# Altium PCB PS Digital Test v1.0.PcbDoc (part 3 of 3)
Units mil, origin at the board's own origin, x right, y up, seen from the top; angles counter-clockwise.
Board outline 3937.01 x 3937.01 mil, 4 copper layers (Top Layer, Signal Layer 1, Signal Layer 2, Bottom Layer), stack 55.634 mil thick; 120 components, 122 nets, 566 pads, 362 vias.
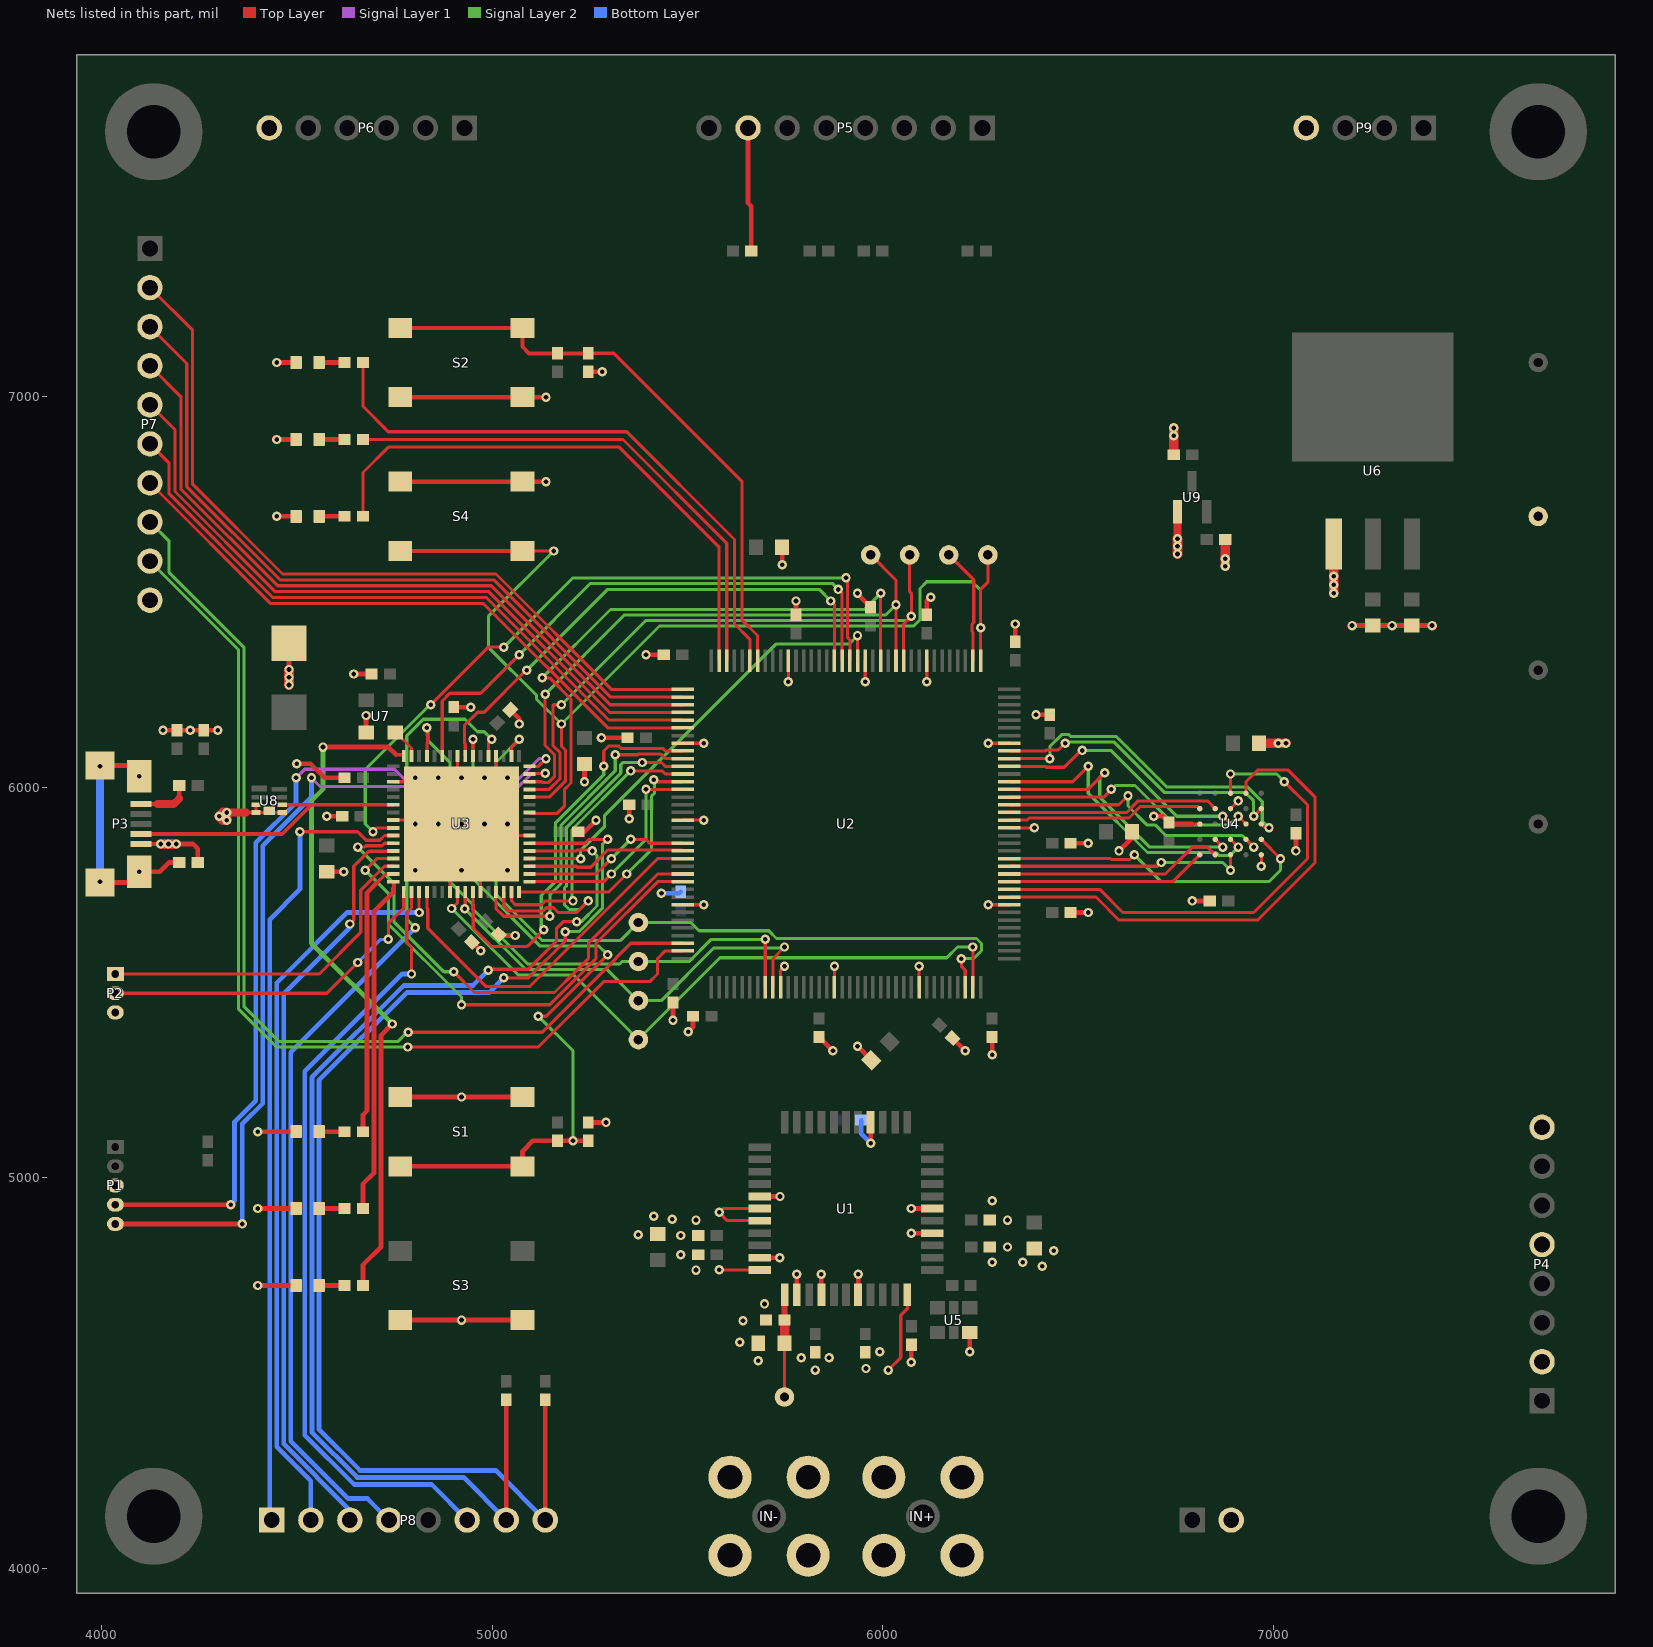
[diagram p4: the nets of this part, all layers, seen from the top]

## Via types
v1: diameter 24, hole 12, Top Layer to Bottom Layer, 350 vias
v2: diameter 24, hole 12, Top Layer to Bottom Layer, tented top, 12 vias

## Nets (pads, with @x,y where several pads share a name; then routed paths per layer and width w, separated by ;. In a path a pad name is that pad's centre, name@x,y a point inside that pad or via, vN(x,y) a via of type N, cw(c..) or ccw(c..) an arc to the next point about the centre after c; other vN are vias at no path point) (continued)
FLED0: R9.1 U2.139 | length 1530.7
  Top Layer w8: R9.1@4669.29,7086.61 4669.29,6974.41 4734.25,6909.45 5344.49,6909.45 5620.08,6633.86 5620.08,6417.32 5659.45,6377.95 U2.139@5659.45,6323.51
FLED1: R10.1 U2.142 | length 1341.7
  Top Layer w8: R10.1@4669.29,6889.76 5334.65,6889.76 5600.39,6624.02 U2.142@5600.39,6323.51
FLED2: R11.1 U2.143 | length 1447.2
  Top Layer w8: R11.1@4669.29,6692.91 4669.29,6805.12 4734.25,6870.08 5324.8,6870.08 5580.71,6614.17 U2.143@5580.71,6323.51
FPGA_DONE: DONE.1 U2.119 U3.13 | length 1577.2
  Top Layer w8: U3.13@5095.47,5994.09 5145.83,5994.09 5173.8,6022.06 5173.8,6087.73 5155.17,6106.36 5155.17,6208.31 5157.48,6210.63 v1(5177.17,6210.63) ; U2.119@6053.15,6323.51 6053.15,6417.32 v1(6072.83,6437.01) 6072.83,6496.06 6068.5,6500.39 DONE.1@6068.5,6594.49
  Signal Layer 2 w8: v1(5177.17,6210.63) 5392.91,6426.38 6062.2,6426.38 v1(6072.83,6437.01)
FPGA_I\N\I\T\: INTN.1 U2.120 U3.14 | length 1582.7
  Top Layer w8: U3.14@5095.47,6013.78 5126.37,6013.78 5128.68,6011.46 5143.4,6011.46 5159.8,6027.86 5159.8,6081.93 5135.48,6106.25 v1(5135.48,6237.84) ; INTN.1@5968.5,6594.49 6033.46,6529.53 v1(6033.46,6466.54) U2.120@6033.46,6323.51
  Signal Layer 2 w8: v1(5135.48,6237.84) 5338.02,6440.38 6007.31,6440.38 v1(6033.46,6466.54)
FPGA_JTAGENB: JTEN.1 U2.110 | length 300.4
  Top Layer w8: JTEN.1@6168.5,6594.49 6232.63,6530.36 6232.63,6421.22 6228,6416.59 6228,6398.37 6230.31,6396.05 U2.110@6230.31,6323.51
FPGA_P\R\O\G\R\A\M\: PGMN.1 S4.2 U2.109 U3.12 | length 2896.2
  Top Layer w8: S4.2@5077.76,6604.33 v1(5157.48,6604.33) ; U3.12@5095.47,5974.41 5145.94,5974.41 5187.8,6016.27 5187.8,6093.53 5177.17,6104.16 v1(5177.17,6161.42) ; U2.109@6250,6323.51 v1(6250,6407.48) 6250,6505.91 6268.5,6524.41 PGMN.1@6268.5,6594.49
  Top Layer w10: S4.2@4764.76,6604.33 S4.2@5077.76,6604.33
  Signal Layer 2 w8: v1(5157.48,6604.33) 4990.16,6437.01 4990.16,6358.27 5113.48,6234.94 5113.48,6225.1 v1(5177.17,6161.42) 5428.13,6412.38 6079.32,6412.38 6094.83,6427.9 6094.83,6508.22 6112.2,6525.59 6228,6525.59 6250,6503.59 v1(6250,6407.48)
FPGA_SW: C62.2 R8.2 S2.2 U2.138 | length 1540.6
  Top Layer w8: C62.2@5246.06,7110.24 5311.02,7110.24 5639.76,6781.5 5639.76,6427.17 5679.13,6387.8 U2.138@5679.13,6323.51
  Top Layer w10: S2.2@4764.76,7175.2 S2.2@5077.76,7175.2 5077.76,7126.97 5094.49,7110.24 R8.2@5167.32,7110.24 C62.2@5246.06,7110.24
FPIO0: U2.128 U3.24 | length 1331.8
  Top Layer w8: U3.24@4931.1,6079.72 4931.1,6110.62 4928.79,6112.93 4928.79,6157.52 4962.94,6191.67 4979.46,6191.67 5088.58,6300.8 v1(5088.58,6299.21) ; v1(5866.14,6476.38) 5875.98,6466.54 U2.128@5875.98,6323.51
  Signal Layer 2 w8: v1(5088.58,6299.21) 5295.28,6505.91 5836.61,6505.91 v1(5866.14,6476.38)
FPIO1: U2.127 U3.27 | length 1472.1
  Top Layer w8: U3.27@4872.05,6079.72 4872.05,6220.47 4891.73,6240.16 4970.47,6240.16 v1(5068.9,6338.58) ; v1(5885.83,6505.91) 5895.67,6496.06 U2.127@5895.67,6323.51
  Signal Layer 2 w8: v1(5068.9,6338.58) 5251.75,6521.43 5870.3,6521.43 v1(5885.83,6505.91)
FPIO2: U2.126 U3.41 | length 1872.6
  Top Layer w8: v1(4694.88,5885.83) 4704.72,5895.67 U3.41@4747.05,5895.67 ; v1(4842.52,6210.63) 4842.52,6210.74 4990.04,6358.27 v1(5029.53,6358.27) ; v1(5905.51,6535.43) 5909.67,6531.28 5909.67,6382.05 5915.35,6376.37 U2.126@5915.35,6323.51
  Signal Layer 2 w8: v1(4694.88,5885.83) 4675.2,5905.51 4675.2,6045.01 v1@4841.67,6211.48 ; v1(5029.53,6358.27) 5206.69,6535.43 v1(5905.51,6535.43)
FPIO3: U2.125 U3.4 | length 1169.1
  Top Layer w8: U3.4@5095.47,5816.93 v1(5226.38,5816.93) ; U2.125@5935.04,6323.51 v1(5935.04,6387.8)
  Signal Layer 2 w8: v1(5226.38,5816.93) 5226.38,5838.2 5287.75,5899.57 5287.75,5927.51 5726.03,6365.8 5913.04,6365.8 v1(5935.04,6387.8)
FPIO4: U2.122 U3.10 | length 1603.9
  Top Layer w8: U3.10@5095.47,5935.04 5097.79,5932.72 5166.59,5932.72 5184.69,5950.82 5184.69,5993.36 5201.8,6010.47 5201.8,6225.26 5147.52,6279.53 v1(5127.95,6279.53) ; U2.122@5994.09,6323.51 v1(5994.09,6496.06)
  Signal Layer 2 w8: v1(5127.95,6279.53) 5302.8,6454.38 5952.41,6454.38 v1(5994.09,6496.06)
FXIO0: P7.2 U2.1 | length 2020.2
  Top Layer w8: P7.2@4124.02,7278.35 4233.23,7169.13 4233.23,6775.2 4463.15,6545.28 5009.84,6545.28 5305.12,6250 U2.1@5487.51,6250
FXIO1: P7.3 U2.2 | length 1940.8
  Top Layer w8: P7.3@4124.02,7178.35 4218.23,7084.13 4218.23,6768.99 4456.94,6530.28 5003.63,6530.28 5303.59,6230.31 U2.2@5487.51,6230.31
FXIO2: P7.4 U2.3 | length 1861.4
  Top Layer w8: P7.4@4124.02,7078.35 4203.23,6999.13 4203.23,6762.77 4450.73,6515.28 4997.42,6515.28 5302.06,6210.63 U2.3@5487.51,6210.63
FXIO3: P7.5 U2.4 | length 1782
  Top Layer w8: P7.5@4124.02,6978.35 4188.23,6914.13 4188.23,6756.56 4444.51,6500.28 4991.2,6500.28 5300.53,6190.94 U2.4@5487.51,6190.94
FXIO4: P7.6 U2.5 | length 1702.5
  Top Layer w8: P7.6@4124.02,6878.35 4173.23,6829.13 4173.23,6750.35 4438.3,6485.28 4984.99,6485.28 5299.01,6171.26 U2.5@5487.51,6171.26
FXIO5: P7.7 U2.6 | length 1623.1
  Top Layer w8: P7.7@4124.02,6778.35 4432.09,6470.28 4976.57,6470.28 5295.28,6151.57 U2.6@5487.51,6151.57
FXIO6: P7.8 U2.34 | length 2604.7
  Top Layer w8: v1(4785.05,5372.43) 5127.95,5372.43 5317.28,5561.75 5317.28,5563.34 5354.33,5600.39 U2.34@5487.51,5600.39
  Signal Layer 2 w8: P7.8@4124.02,6678.35 4173.23,6629.13 4173.23,6548.93 4364.39,6357.77 4364.39,5438.87 4454.62,5348.65 4758.09,5348.65 4781.88,5372.43 v1(4785.05,5372.43)
FXIO7: P7.9 U2.35 | length 2541.9
  Top Layer w8: v1(4783.46,5334.65) 5118.11,5334.65 5285.43,5501.97 5403.54,5501.97 5423.23,5521.65 5423.23,5561.02 5442.91,5580.71 U2.35@5487.51,5580.71
  Signal Layer 2 w8: P7.9@4124.02,6578.35 4350.39,6351.97 4350.39,5433.07 4448.82,5334.65 v1(4783.46,5334.65)
GND: C1.1 C2.1 C3.1 C4.1 C5.1 C6.1 C7.1 C8.1 C9.1 C10.1 C11.1 C12.1 C13.1 C14.1 C15.1 C16.1 C17.1 C18.1 C19.1 C20.1 C21.1 C22.1 C23.1 C24.1 C25.1 C26.1 C27.1 C28.1 C29.1 C30.1 C31.1 C32.1 C41.1 C42.1 C43.1 C44.1 C46.1 C47.1 C48.1 C49.1 C50.1 C51.1 C52.1 C53.1 C54.1 C55.1 C56.1 C57.1 C58.1 C59.1 C60.1 C61.1 C62.1 D1.2 D2.2 D3.2 D4.1 D5.2 D6.2 D7.2 GND.1 IN+.2 IN-.2 L1.1 P1.3 P2.3 P3.5 P4.2 P4.5 P4.8 P5.7 P6.6 P7.10 P9.4 P10.2 R15.1 S1.1 S2.1 S3.2 S4.1 U1.4 U1.6 U1.15 U1.27 U1.28 U1.29 U1.32 U1.33 U1.35 U1.37 U1.40 U1.44 U2.8 U2.18 U2.29 U2.46 U2.53 U2.64 U2.80 U2.90 U2.101 U2.116 U2.124 U2.134 U3.7 U3.20 U3.25 U3.35 U3.40 U3.55 U3.59 U3.65 U4.B3 U4.C1 U4.E5 U5.3 U6.1 U7.2 U8.0 U8.3 U8.4 U8.5 U9.1 | length 7935.3
  Top Layer w8: 4370.08,5935.04 U8.4@4395.67,5935.04 ; U8.3@4395.67,5954.72 U8.4@4395.67,5935.04 ; U8.5@4462.6,5935.04 U8.4@4395.67,5935.04 ; U3.40@4747.05,5915.35 4911.42,5915.35 U3.25@4911.42,6079.72 ; U3.35@4747.05,6013.78 U3.65@4812.99,6013.78 ; U3.55@4891.73,5731.3 U3.65@4891.73,5875.98 ; U3.65@4950.79,5875.98 U3.7@5095.47,5875.98 ; U3.59@4970.47,5731.3 U3.65@4970.47,5856.3 ; U3.65@5009.84,5994.09 U3.20@5009.84,6079.72 ; U2.29@5487.51,5698.82 v1(5541.34,5698.82) ; U2.18@5487.51,5915.35 v1(5541.34,5915.35) ; U2.8@5487.51,6112.2 v1(5541.34,6112.2) ; v1(5581.19,4764.26) U1.33@5684.51,4764.26 ; U1.29@5684.51,4890.26 5601.87,4890.26 v1(5580.71,4911.42) 5590.55,4921.26 U1.28@5684.51,4921.26 ; U2.46@5738.19,5487.51 5738.19,5531.5 v1(5748.03,5541.34) ; v1(5757.87,6269.69) U2.134@5757.87,6323.51 ; U2.53@5875.98,5487.51 v1(5875.98,5541.34) ; v1(5954.72,6269.69) U2.124@5954.72,6323.51 ; v1(6013.78,4507.87) 6045.51,4539.61 6045.51,4647.87 6062.51,4664.87 U1.44@6062.51,4700.26 ; U2.64@6092.52,5487.51 v1(6092.52,5541.34) ; v1(6112.2,6269.69) U2.116@6112.2,6323.51 ; v1(6269.69,5698.82) U2.80@6323.51,5698.82 ; v1(6269.69,6112.2) U2.101@6323.51,6112.2 ; U2.90@6323.51,5895.67 v1(6387.8,5895.67) ; 6791.34,5905.51 U4.C1@6811.02,5905.51 ; U4.B3@6889.76,5944.88 v2(6909.45,5964.57) ; v2(6968.5,5797.24) U4.E5@6968.5,5826.77
  Top Layer w10: P3.5@4101.38,5854.33 v1(4151.57,5854.33)
  Top Layer w12: v1(4157.48,6145.67) C12.1@4192.91,6145.67 C13.1@4261.81,6145.67 v1(4297.24,6145.67) ; v1(4190.94,5854.33) 4234.25,5854.33 4246.06,5842.52 L1.1@4246.06,5807.09 ; v1(4399.61,4724.41) D3.2@4498.03,4724.41 ; v1(4399.61,4921.26) D2.2@4498.03,4921.26 ; v1(4399.61,5118.11) D1.2@4498.03,5118.11 ; v1(4448.82,6692.91) D7.2@4498.03,6692.91 ; v1(4448.82,6889.76) D6.2@4498.03,6889.76 ; v1(4448.82,7086.61) D5.2@4498.03,7086.61 ; v1(4480,6300.87) D4.1@4480,6368.58 ; v1(4500,6060) 4534.96,6060 4571.34,6023.62 C17.1@4622.05,6023.62 ; C30.1@4576.77,5783.46 v1(4620.08,5783.46) ; v1(4576.77,5925.2) C16.1@4616.14,5925.2 ; v1(4645.67,6289.37) C10.1@4690.94,6289.37 ; U7.2@4677.17,6139.76 v1(4677.17,6183.07) ; S3.2@4764.76,4635.83 S3.2@5077.76,4635.83 ; S1.1@4764.76,5206.69 S1.1@5077.76,5206.69 ; S4.1@4764.76,6781.5 S4.1@5077.76,6781.5 v1(5137.8,6781.5) ; S2.1@4764.76,6998.03 S2.1@5077.76,6998.03 v1(5137.8,6998.03) ; C18.1@4901.57,6204.72 v1(4944.88,6204.72) ; C15.1@4947.81,5603.38 v1(4970.47,5580.71) ; C14.1@5019.68,5620.08 v1(5059.06,5620.08) ; C19.1@5046.23,6197.81 5068.9,6175.14 v1(5068.9,6161.42) ; C20.1@5220.47,5885.83 5236.22,5885.83 v1(5265.75,5915.35) ; v1(5236.22,6013.78) C61.1@5236.22,6059.06 ; C11.1@5246.06,5141.73 v1(5291.34,5141.73) ; C62.1@5246.06,7062.99 v1(5281.5,7062.99) ; v1(5279.53,6125.98) C60.1@5346.46,6125.98 ; v1(5350.39,5919.29) C59.1@5350.39,5954.72 ; v1(5393.7,6338.58) C41.1@5438.98,6338.58 ; v1(5462.6,5403.54) C44.1@5462.6,5448.82 ; v1(5501.97,5374.02) 5513.78,5385.83 C54.1@5513.78,5413.39 ; P5.7@5654.72,7687.01 5654.72,7494.88 5663.39,7486.22 R15.1@5663.39,7372.05 ; U1.32@5684.51,4795.26 v1(5736.24,4795.26) ; U1.27@5684.51,4952.26 v1(5736.72,4952.26) ; v1(5742.13,6568.9) C49.1@5742.13,6614.17 ; C46.1@5777.56,6440.94 v1(5777.56,6476.38) ; U1.35@5779.51,4700.26 v1(5779.51,4753.5) ; C55.1@5836.61,5360.24 v1(5872.05,5324.8) ; U1.37@5842.51,4700.26 v1@5842.51,4749.99 ; v1(5935.04,5336.53) C57.1@5970.43,5301.14 ; v1(5935.04,6496.06) 5935.04,6494.09 C47.1@5968.5,6460.63 ; U1.40@5936.51,4700.26 v1(5936.51,4753.5) ; v1(5968.51,5088.58) U1.15@5968.51,5142.26 ; v1(6072.83,4527.56) C8.1@6072.83,4572.83 ; v1(6072.83,4858.26) U1.4@6126.51,4858.26 ; v1(6072.83,4921.26) U1.6@6126.51,4921.26 ; C48.1@6112.2,6440.94 6112.2,6476.38 v1(6122.05,6486.22) ; C56.1@6178.12,5357.31 v1(6210.63,5324.8) ; v1(6222.44,4555.12) U5.3@6222.44,4604.33 ; v1(6279.53,5314.96) C43.1@6279.53,5360.24 ; C42.1@6338.58,6372.05 v1(6338.58,6417.32) ; v1(6391.73,6185.04) C50.1@6427.17,6185.04 ; C52.1@6480.31,5679.13 v1(6525.59,5679.13) ; C51.1@6480.31,5856.3 v1(6525.59,5856.3) ; v1(6604.33,5836.61) 6637.8,5870.08 C53.1@6637.8,5885.83 ; v1(6692.9,5925.19) 6716.54,5925.19 C22.1@6732.28,5909.45 6736.22,5905.51 6791.34,5905.51 ; v1(6791.34,5708.66) C21.1@6836.61,5708.66 ; v1(7057.09,5836.61) C23.1@7057.09,5881.89 ; v1(7200.79,6413.39) C25.1@7253.94,6413.39 C26.1@7353.94,6413.39 v1(7405.51,6413.39)
  Top Layer w20: v1(4320.87,5935.04) 4370.08,5935.04 ; v1(6753.94,6635.83) U9.1@6753.94,6704.72
  Top Layer w25: v1(4151.57,5854.33) v1(4171.26,5854.33) v1(4190.94,5854.33) ; v1(4480,6261.5) v1(4480,6281.18) v1(4480,6300.87) ; C31.1@6744.09,6850.39 v1(6744.1,6919.29) ; v1(6753.94,6596.46) v1(6753.94,6635.83) ; v1(6875.99,6564.96) C32.1@6875.99,6633.86 ; C29.1@6962.6,6112.2 v1(7031.5,6112.2) ; v1(7153.94,6496.06) U6.1@7153.94,6622.05 ; v1(4301.18,5925.2) 4311.02,5935.04 v1(4320.87,5935.04) v1(4320.87,5915.35) 4311.02,5915.35 v1(4301.18,5925.2)
  Bottom Layer w12: v1(5433.07,5728.35) 5478.35,5728.35 C58.1@5482.28,5732.28 ; C1.1@5944.88,5147.64 5944.88,5112.21 v1(5968.51,5088.58)
  other v1: 5826.77,4507.87 5956.69,4511.81 5681.1,4531.5 5791.34,4539.37 5862.2,4539.37 5992.13,4555.12 5633.86,4578.74 5641.73,4633.86 4921.26,4635.83 5696.85,4677.17 5842.51,4753.5 5521.65,4763.78 6407.48,4773.62 6279.53,4783.46 6358.27,4783.46 5482.28,4803.15 6437.01,4812.99 6318.9,4822.83 5482.28,4852.36 5374.02,4854.33 5521.65,4891.73 6318.9,4891.73 5460.63,4893.7 5413.39,4901.57 6279.53,4940.94 4921.26,5206.69 4803.15,5787.4 4921.26,5787.4 5039.37,5787.4 4803.15,5905.51 4862.2,5905.51 4921.26,5905.51 4980.31,5905.51 5039.37,5905.51 4803.15,6023.62 4862.2,6023.62 4921.26,6023.62 4980.31,6023.62 5039.37,6023.62 7011.81,6112.2 4227.36,6145.67 7303.15,6413.39 7153.94,6517.72 7153.94,6539.37 6875.99,6584.65 6753.94,6616.14 6744.09,6899.61
L\D\A\C\: P8.6 U3.50 | length 2032.3
  Top Layer w8: v1(4793.31,5521.65) 4793.31,5590.55 4781.15,5602.71 4781.15,5678.4 4793.31,5690.56 U3.50@4793.31,5731.3
  Bottom Layer w12: v1(4793.31,5521.65) 4769.55,5521.65 4520.55,5272.66 4520.55,4341.11 4646.67,4215 4844.84,4215 P8.6@4935.83,4124.02
LED0: R4.1 U3.47 | length 703.2
  Top Layer w8: 4704.72,5754.93 4727.35,5777.56 U3.47@4747.05,5777.56
  Top Layer w12: R4.1@4669.29,5118.11 4669.29,5161.42 4679.51,5171.64 4679.51,5729.72 4704.72,5754.93
LED1: R5.1 U3.48 | length 868.8
  Top Layer w8: 4747.05,5741.14 U3.48@4747.05,5757.87
  Top Layer w12: R5.1@4669.29,4921.26 4669.29,4984.25 4697.51,5012.47 4697.51,5681.76 4747.05,5731.3 4747.05,5741.14
LED2: R6.1 U3.32 | length 1718.7
  Top Layer w8: 4753.94,6082.68 U3.32@4770.67,6082.68
  Top Layer w12: v1(4566.93,6102.36) 4734.25,6102.36 4753.94,6082.68 ; R6.1@4669.29,4724.41 4669.29,4777.56 4715.51,4823.78 4715.51,5365.12 v1(4744.09,5393.7)
  Signal Layer 2 w12: v1(4566.93,6102.36) 4566.93,5994.09 4537.4,5964.57 4537.4,5600.39 v1(4744.09,5393.7)
MEM_C\S\: U2.82 U4.A3 | length 1261.1
  Top Layer w8: U2.82@6323.51,5738.19 6555.12,5738.19 6614.17,5679.13 6948.82,5679.13 7086.61,5816.93 7086.61,5954.72 v1(7027.56,6013.78) ; U4.A3@6889.76,5984.25 v2(6889.76,6033.46)
  Signal Layer 2 w8: v2(6889.76,6033.46) 7007.87,6033.46 v1(7027.56,6013.78)
MEM_CK_N: U2.91 U4.B1 | length 504.5
  Top Layer w8: U2.91@6323.51,5915.35 6368.11,5915.35 6373.8,5921.04 6629.81,5921.04 6659.34,5950.57 6805.34,5950.57 U4.B1@6811.02,5944.88
MEM_CK_P: U2.92 U4.B2 | length 547.3
  Top Layer w8: U2.92@6323.51,5935.04 6624.02,5935.04 6653.54,5964.57 6830.71,5964.57 U4.B2@6850.39,5944.88
MEM_D0: U2.96 U4.D3 | length 774.3
  Top Layer w8: U2.96@6323.51,6013.78 6486.22,6013.78 v1(6525.59,6053.15) ; U4.D3@6889.76,5866.14 v2(6909.45,5846.46)
  Signal Layer 2 w8: v1(6525.59,6053.15) 6525.59,5984.14 6677.27,5832.46 6852.97,5832.46 6860.97,5824.46 6887.45,5824.46 v2(6909.45,5846.46)
MEM_D1: U2.95 U4.D2 | length 725.6
  Top Layer w8: U2.95@6323.51,5994.09 6525.59,5994.09 v1(6568.1,6036.6) ; U4.D2@6850.39,5866.14 v2(6870.08,5846.46)
  Signal Layer 2 w8: v1(6568.1,6036.6) 6555.12,6023.62 6555.12,5974.41 6683.07,5846.46 v2(6870.08,5846.46)
MEM_D2: U2.94 U4.C4 | length 676.8
  Top Layer w8: U2.94@6323.51,5974.41 6564.96,5974.41 v1(6584.65,5994.09) ; v2(6909.45,5925.2) U4.C4@6929.13,5905.51
  Signal Layer 2 w8: v1(6584.65,5994.09) 6594.49,6003.94 6645.27,6003.94 6746.01,5903.2 6887.45,5903.2 v2(6909.45,5925.2)
MEM_D3: U2.93 U4.D4 | length 732.1
  Top Layer w8: U2.93@6323.51,5954.72 6604.33,5954.72 v1(6627.15,5977.54) ; U4.D4@6929.13,5866.14 v2(6948.82,5846.46)
  Signal Layer 2 w8: v1(6627.15,5977.54) 6627.15,5951.59 6675.55,5903.19 6696.82,5903.19 6724.03,5875.98 6919.29,5875.98 v2(6948.82,5846.46)
MEM_D4: U2.86 U4.D5 | length 840.1
  Top Layer w8: U2.86@6323.51,5816.93 6582.33,5816.93 6584.65,5814.61 6631.54,5814.61 v1(6643.7,5826.77) ; U4.D5@6968.5,5866.14 v1(7017.72,5816.93)
  Signal Layer 2 w8: v1(6643.7,5826.77) 6712.6,5757.87 6988.19,5757.87 7017.72,5787.4 v1(7017.72,5816.93)
MEM_D5: U2.85 U4.E3 | length 617.9
  Top Layer w8: U2.85@6323.51,5797.24 6702.76,5797.24 v1(6712.6,5807.09) ; v2(6889.76,5787.4) U4.E3@6889.76,5826.77
  Signal Layer 2 w8: v1(6712.6,5807.09) 6870.08,5807.09 v2(6889.76,5787.4)
MEM_D6: U2.84 U4.E2 | length 563.6
  Top Layer w8: U2.84@6323.51,5777.56 6722.44,5777.56 6791.34,5846.46 6830.71,5846.46 U4.E2@6850.39,5826.77
MEM_D7: U2.83 U4.E1 | length 516.1
  Top Layer w8: U2.83@6323.51,5757.87 6742.13,5757.87 U4.E1@6811.02,5826.77
MEM_PSC_N: U2.99 U4.C5 | length 859.8
  Top Layer w8: U2.99@6323.51,6072.83 v1(6427.17,6072.83) ; U4.C5@6968.5,5905.51 6978.36,5895.66 v1(6988.18,5895.66)
  Signal Layer 2 w8: v1(6427.17,6072.83) 6427.17,6103.95 6457.42,6134.2 6475.65,6134.2 6480,6129.85 6596.64,6129.85 6725.92,6000.57 6932.62,6000.57 6970.82,5962.37 6970.82,5913.01 v1(6988.18,5895.66)
MEM_PSC_P: U2.100 U4.B5 | length 764.8
  Top Layer w8: U2.100@6323.51,6092.52 6415.74,6092.52 6418.05,6094.83 6449.17,6094.83 v1(6466.54,6112.2) ; v2(6948.82,5925.2) U4.B5@6968.5,5944.88
  Signal Layer 2 w8: v1(6466.54,6112.2) 6470.18,6115.85 6590.84,6115.85 6720.13,5986.57 6926.82,5986.57 6948.82,5964.57 v2(6948.82,5925.2)
MEM_R\E\S\E\T\: U2.81 U4.A4 | length 1283.2
  Top Layer w8: U2.81@6323.51,5718.5 6545.28,5718.5 6604.33,5659.45 6958.66,5659.45 7106.3,5807.09 7106.3,5974.41 7037.4,6043.31 6958.66,6043.31 6929.13,6013.78 U4.A4@6929.13,5984.25
MEM_RWDS: U2.98 U4.C3 | length 663
  Top Layer w8: U2.98@6323.51,6053.15 6415.74,6053.15 6418.05,6050.83 6464.22,6050.83 6507.24,6093.85 v1(6510.24,6093.85) ; v2(6870.08,5925.2) U4.C3@6889.76,5905.51
  Signal Layer 2 w8: v1(6510.24,6093.85) 6583.31,6093.85 6751.97,5925.2 v2(6870.08,5925.2)
NetD1_1: D1.1 R4.2 | length 65
  Top Layer w12: D1.1@4557.09,5118.11 R4.2@4622.05,5118.11
NetD2_1: D2.1 R5.2 | length 65
  Top Layer w12: D2.1@4557.09,4921.26 R5.2@4622.05,4921.26
NetD3_1: D3.1 R6.2 | length 65
  Top Layer w12: D3.1@4557.09,4724.41 R6.2@4622.05,4724.41
NetD5_1: D5.1 R9.2 | length 65
  Top Layer w12: D5.1@4557.09,7086.61 R9.2@4622.05,7086.61
NetD6_1: D6.1 R10.2 | length 65
  Top Layer w12: D6.1@4557.09,6889.76 R10.2@4622.05,6889.76
NetD7_1: D7.1 R11.2 | length 65
  Top Layer w12: D7.1@4557.09,6692.91 R11.2@4622.05,6692.91
NetL1_2: L1.2 P3.6 | length 633
  Top Layer w12: v1(3996.06,5757.87) P3.6@3996.06,5755.91 4068.9,5755.91 v1(4096.46,5783.46) 4149.61,5783.46 4173.23,5807.09 L1.2@4198.82,5807.09 ; P3.6@3996.06,6055.12 4068.9,6055.12 v1(4096.46,6027.56)
  Bottom Layer w20: v1(3996.06,5757.87) v1(3996.06,6053.15)
NetL7_1: L7.1 P3.1 | length 136.6
  Top Layer w10: P3.1@4101.38,5956.69 4143.7,5956.69
  Top Layer w12: 4198.82,5970.47 L7.1@4198.82,6003.94
  Top Layer w20: 4143.7,5956.69 4185.04,5956.69 4198.82,5970.47
OSC24: U3.31 U7.3 | length 76
  Top Layer w8: U7.3@4753.94,6139.42 4793.31,6100.05 U3.31@4793.31,6079.72
PGC: P1.5 U3.15 | length 2214.5
  Top Layer w8: U3.15@5095.47,6033.46 5097.23,6035.22 v1(5136.04,6035.22)
  Top Layer w12: P1.5@4035.43,4881.89 v1(4360.24,4881.89)
  Signal Layer 1 w8: v1(4537.4,6023.62) 4559.4,6001.62 4774.24,6001.62 4788.24,5987.62 5054.28,5987.62 5101.88,6035.22 v1(5136.04,6035.22)
  Bottom Layer w12: v1(4360.24,4881.89) 4360.24,5137.8 4412.55,5190.11 4412.55,5849.56 4537.4,5974.41 v1(4537.4,6023.62)
PGD: P1.4 U3.16 | length 2204.2
  Top Layer w8: U3.16@5095.47,6053.15 5118.11,6053.15 v1(5137.79,6072.83)
  Top Layer w12: P1.4@4035.43,4931.1 v1(4330.71,4931.1)
  Signal Layer 1 w8: v1(4498.03,6023.62) 4520.03,6045.62 4546.51,6045.62 4750.04,6045.62 4794.04,6001.62 5048.48,6001.62 5119.7,6072.83 v1(5137.79,6072.83)
  Bottom Layer w12: v1(4330.71,4931.1) 4340.55,4940.94 4340.55,5143.57 4394.55,5197.57 4394.55,5857.02 4498.03,5960.5 v1(4498.03,6023.62)
PIC_SW: C11.2 R7.2 S1.2 U3.23 | length 1953.1
  Top Layer w8: U3.23@4950.79,6079.72 v1(4950.79,6122.05) ; v1(5118.11,5413.39) 5138.02,5413.39 5295.28,5570.64 v1(5295.28,5570.87)
  Top Layer w12: S1.2@4764.76,5029.53 S1.2@5077.76,5029.53 5077.76,5067.91 5104.33,5094.49 R7.2@5167.32,5094.49 v1(5206.69,5094.49) C11.2@5246.06,5094.49
  Signal Layer 2 w8: v1(4950.79,6122.05) 4950.79,5765.03 5122.95,5592.87 5273.28,5592.87 v1(5295.28,5570.87) ; v1(5118.11,5413.39) 5206.69,5324.8 v1(5206.69,5094.49)
PMCS1: U2.26 U3.45 | length 1250.1
  Top Layer w8: v1(4675.2,5787.4) 4704.72,5816.93 U3.45@4747.05,5816.93 ; v1(4921.26,5442.91) 5147.64,5442.91 5218.06,5513.34 5218.18,5513.34 5260.06,5555.22 5260.06,5555.34 5265.75,5561.02 5265.75,5600.05 5423.57,5757.87 U2.26@5487.51,5757.87
  Signal Layer 2 w8: v1(4675.2,5787.4) 4734.25,5728.35 4734.25,5649.61 4921.26,5462.6 v1(4921.26,5442.91)
PMD0: U2.9 U3.58 | length 1049.3
  Top Layer w8: U3.58@4950.79,5731.3 4950.79,5698.73 4951.43,5698.09 4951.43,5639.13 4998.37,5592.18 5088.63,5592.18 5089.31,5592.86 5090.54,5592.86 v1(5132.21,5634.53) ; v1(5285.43,6053.15) 5285.43,6092.52 5297.59,6104.68 5324.07,6104.68 5329.76,6098.99 5436.78,6098.99 5443.25,6092.52 U2.9@5487.51,6092.52
  Signal Layer 2 w8: v1(5132.21,5634.53) 5125.63,5641.1 5125.63,5722.34 5162.38,5759.09 5162.38,5908.82 5285.43,6031.88 v1(5285.43,6053.15)
PMD1: U2.10 U3.61 | length 849.6
  Top Layer w8: U3.61@5009.84,5731.3 5009.84,5688.86 5029.42,5669.28 v1(5147.63,5669.28) ; v1(5314.96,6082.68) 5372.43,6082.68 5374.75,6084.99 5430.98,6084.99 5443.14,6072.83 U2.10@5487.51,6072.83
  Signal Layer 2 w8: v1(5147.63,5669.28) 5147.63,5724.54 5176.38,5753.29 5176.38,5903.03 5314.96,6041.61 v1(5314.96,6082.68)
PMD2: U2.11 U3.62 | length 937.1
  Top Layer w8: U3.62@5029.53,5731.3 5029.53,5694.67 5040.91,5683.28 5130.52,5683.28 5138.52,5691.28 5156.74,5691.28 5168.89,5679.13 5216.54,5679.13 v1(5246.06,5708.65) ; v1(5383.86,6062.99) 5433.18,6062.99 5443.03,6053.15 U2.11@5487.51,6053.15
  Signal Layer 2 w8: v1(5246.06,5708.65) 5224.06,5686.66 5197.58,5686.66 5184.69,5699.55 5184.69,5741.81 5190.38,5747.49 5190.38,5897.23 5328.96,6035.81 5328.96,6057.31 5335.03,6063.38 5383.47,6063.38 v1(5383.86,6062.99)
PMD3: U2.12 U3.63 | length 720.5
  Top Layer w8: U3.63@5049.21,5731.3 5049.21,5708.66 5059.06,5698.82 5126.25,5698.82 5136.1,5708.66 v1(5206.69,5708.66) ; v1(5354.33,6041.38) 5354.72,6040.99 5435.39,6040.99 5442.91,6033.46 U2.12@5487.51,6033.46
  Signal Layer 2 w8: v1(5206.69,5708.66) 5204.38,5710.98 5204.38,5891.43 v1(5354.33,6041.38)
PMD4: U2.13 U3.64 | length 642.1
  Top Layer w8: U3.64@5068.9,5731.3 5298.23,5731.3 v1(5344.49,5777.56) ; v1(5413.39,6018.41) 5418.02,6013.78 U2.13@5487.51,6013.78
  Signal Layer 2 w8: v1(5344.49,5777.56) 5408.17,5841.24 5408.17,5977.45 5415.7,5984.98 5415.7,6016.09 v1(5413.39,6018.41)
PMD5: U2.14 U3.1 | length 564.8
  Top Layer w8: U3.1@5095.47,5757.87 5285.43,5757.87 v1(5305.12,5777.56) ; v1(5393.7,5994.09) U2.14@5487.51,5994.09
  Signal Layer 2 w8: v1(5305.12,5777.56) 5393.7,5866.14 v1(5393.7,5994.09)
PMD6: U2.21 U3.2 | length 432.8
  Top Layer w8: U3.2@5095.47,5777.56 5265.75,5777.56 v1(5305.11,5816.92) ; v1(5354.33,5866.14) 5393.7,5866.14 5403.54,5856.3 U2.21@5487.51,5856.3
  Signal Layer 2 w8: v1(5305.11,5816.92) v1(5354.33,5866.14)
PMD7: U2.22 U3.3 | length 412.2
  Top Layer w8: U3.3@5095.47,5797.24 5214.95,5797.24 5217.27,5794.93 5252.01,5794.93 5296,5838.92 5485.2,5838.92 U2.22@5487.51,5836.61
PMDC: U2.25 U3.43 | length 1287.8
  Top Layer w8: v1(4655.51,5846.46) 4673.56,5846.46 4676.93,5849.83 4718.05,5849.83 4724.52,5856.3 U3.43@4747.05,5856.3 ; v1(4901.57,5527.34) 4954.5,5474.41 5159.34,5474.41 5212.26,5527.34 5212.38,5527.34 5246.06,5561.02 5246.06,5600.17 5423.46,5777.56 U2.25@5487.51,5777.56
  Signal Layer 2 w8: v1(4655.51,5846.46) 4748.25,5753.72 4748.25,5655.41 4876.32,5527.34 v1(4901.57,5527.34)
PMENB: U2.23 U3.52 | length 943.6
  Top Layer w8: U3.52@4832.68,5731.3 4832.68,5690.56 4834.99,5688.25 4834.99,5639.03 4984.85,5489.17 5095.47,5489.17 5423.23,5816.93 U2.23@5487.51,5816.93
S\S\3\: FCS.1 U2.70 U3.18 | length 1960.4
  Top Layer w8: U3.18@5049.21,6079.72 5049.21,6102.36 v1(5068.9,6122.05) ; v1(6200.79,5561.02) 6200.79,5541.34 6210.63,5531.5 U2.70@6210.63,5487.51
  Signal Layer 2 w8: v1(5068.9,6122.05) 5009.84,6062.99 5009.84,5725.78 5128.75,5606.87 5327.38,5606.87 FCS.1@5374.02,5653.5 5507.91,5653.5 5529.18,5632.24 5707.93,5632.24 5727.62,5612.55 6239.43,5612.55 6252.31,5599.66 6252.31,5581.44 6231.9,5561.02 v1(6200.79,5561.02)
S\S\4\: P8.4 U3.21 | length 2583.8
  Top Layer w8: U3.21@4990.16,6079.72 4990.16,6113.19 v1(4999.02,6122.05)
  Signal Layer 2 w8: v1(4803.15,5639.76) 4781.15,5661.76 4781.15,6131.16 4823.56,6173.57 4930.37,6173.57 4962.22,6141.73 4979.33,6141.73 v1(4999.02,6122.05)
  Bottom Layer w12: P8.4@4735.83,4124.02 4680.84,4179 4631.76,4179 4484.55,4326.2 4484.55,5321.17 v1(4803.15,5639.76)
SCK3: FSCK.1 U2.44 U3.29 | length 1541.7
  Top Layer w8: U3.29@4832.68,6079.72 4832.68,6110.62 4834.99,6112.93 4834.99,6131.16 4832.68,6133.47 v1(4832.68,6151.57) ; U2.44@5698.82,5487.51 v1(5698.82,5610.24)
  Signal Layer 2 w8: v1(4832.68,6151.57) 4834.99,6149.26 4834.99,6119.85 4891.73,6063.11 4891.73,5757.78 4951.43,5698.09 4951.43,5686.74 5090.83,5547.34 5326.16,5547.34 5332.32,5553.5 5504.29,5553.5 5561.02,5610.24 v1(5698.82,5610.24)
SCK4: P8.3 U3.44 | length 1935.2
  Top Layer w8: v1(4635.83,5649.61) 4645.67,5659.45 4645.67,5797.24 4684.25,5835.83 4746.26,5835.83 U3.44@4747.05,5836.61
  Bottom Layer w12: P8.3@4635.83,4124.02 4635.83,4149.47 4466.55,4318.74 4466.55,5470.49 4635.83,5639.76 v1(4635.83,5649.61)
SCL4: P8.8 R17.1 U3.6 | length 3184.4
  Top Layer w8: v1(5029.53,5511.81) 5092.63,5511.81 5187,5606.18 v1(5187,5629.91) ; U3.6@5095.47,5856.3 5237.81,5856.3 5247.65,5866.14 v1(5295.28,5866.14)
  Top Layer w12: P8.8@5135.83,4124.02 R17.1@5135.83,4432.09
  Signal Layer 2 w8: v1(5187,5629.91) 5222.05,5629.91 5282.06,5689.92 5282.06,5852.92 v1(5295.28,5866.14)
  Bottom Layer w12: v1(5029.53,5511.81) 4991.84,5474.13 4781.08,5474.13 4556.55,5249.6 4556.55,4356.02 4661.58,4251 5008.84,4251 P8.8@5135.83,4124.02
SDA4: P8.7 R16.1 U3.5 | length 3045.5
  Top Layer w8: v1(4990.16,5531.5) 4992.47,5533.81 5092.48,5533.81 5165,5606.33 5165,5639.03 5181.49,5655.51 v1(5216.54,5655.51) ; U3.5@5095.47,5836.61 5214.95,5836.61 5217.27,5838.93 5253.59,5838.93 v1(5255.91,5836.61)
  Top Layer w12: P8.7@5035.83,4124.02 R16.1@5035.83,4432.09
  Signal Layer 2 w8: v1(5216.54,5655.51) 5227.85,5655.51 5268.06,5695.72 5268.06,5824.46 v1(5255.91,5836.61)
  Bottom Layer w12: v1(4990.16,5531.5) 4950.79,5492.13 4773.62,5492.13 4538.55,5257.06 4538.55,4348.57 4654.12,4233 4926.84,4233 P8.7@5035.83,4124.02
SDI3: FMISO.1 U2.45 U3.57 | length 1138
  Top Layer w8: U3.57@4931.1,5731.3 4931.1,5687.3 v1@4935.19,5683.22 ; U2.45@5718.5,5487.51 5718.5,5561.02 v1(5748.03,5590.55)
  Signal Layer 2 w8: v1@4929.43,5688.94 5085.03,5533.34 5293.43,5533.34 5373.27,5453.5 5432.23,5453.5 5566.97,5588.24 5745.72,5588.24 v1(5748.03,5590.55)
  other v1: 4929.43,5688.98
SDI4: P8.1 U3.42 | length 2049.3
  Top Layer w8: v1(4507.87,5885.83) 4655.51,5885.83 4677.51,5863.83 4712.25,5863.83 4724.41,5875.98 U3.42@4747.05,5875.98
  Bottom Layer w12: P8.1@4435.83,4124.02 4430.55,4129.29 4430.55,5660.87 4507.87,5738.19 v1(4507.87,5885.83)
SDO3: FMOSI.1 U2.71 U3.56 | length 1727.2
  Top Layer w8: v1@4891.73,5688.97 4892.21,5689.45 4892.36,5689.29 v1(4896.05,5689.29) 4911.42,5704.66 U3.56@4911.42,5731.3 ; U2.71@6230.31,5487.51 v1(6230.31,5590.55)
  Signal Layer 2 w8: v1(4896.05,5689.29) 5066,5519.34 5208.18,5519.34 5373.6,5353.92 5538.89,5519.2 5583.02,5563.34 6163.73,5563.34 6190.94,5590.55 v1(6230.31,5590.55)
SDO4: P8.2 U3.51 | length 1902.1
  Top Layer w8: v1(4812.99,5679.13) U3.51@4812.99,5731.3
  Bottom Layer w12: P8.2@4535.83,4124.02 4535.83,4224.02 4448.55,4311.29 4448.55,5498.59 4629.1,5679.13 v1(4812.99,5679.13)
UART1_RX: P2.1 U3.46 | length 889.2
  Top Layer w8: P2.1@4035.43,5521.65 4557.09,5521.65 4663.51,5628.08 4663.51,5736.35 4724.41,5797.24 U3.46@4747.05,5797.24
UART1_TX: P2.2 U3.49 | length 893.3
  Top Layer w8: P2.2@4035.43,5472.44 4576.77,5472.44 v1(4655.51,5551.18) ; v1(4734.25,5610.24) 4734.25,5651.31 4773.62,5690.68 U3.49@4773.62,5731.3
  Bottom Layer w8: v1(4655.51,5551.18) 4714.57,5610.24 v1(4734.25,5610.24)
USBID: P3.4 U3.38 U8.6 | length 751.5
  Top Layer w10: P3.4@4101.38,5879.92 4462.6,5879.92 4537.4,5954.72 ; U8.6@4462.6,5954.72 U3.38@4747.05,5954.72
Vref: C9.2 C24.2 U1.34 Vref.1 | length 260.8
  Top Layer w8: Vref.1@5748.51,4439.46 C24.2@5748.51,4577.25
  Top Layer w15: C9.2@5748.51,4636.31 U1.34@5748.51,4700.26
  Top Layer w25: C24.2@5748.51,4577.25 C9.2@5748.51,4636.31
pads on no net: P5.4 P5.5 PAD1.1 PAD2.1 PAD3.1 PAD4.1 U2.15 U2.17 U2.19 U2.20 U2.27 U2.28 U2.31 U2.32 U2.33 U2.38 U2.39 U2.40 U2.41 U2.55 U2.56 U2.63 U2.73 U2.74 U2.75 U2.76 U2.77 U2.78 U2.87 U2.89 U2.97 U2.103 U2.104 U2.105 U2.106 U2.107 U2.115 U2.117 U2.121 U2.129 U2.132 U2.133 U2.140 U2.141 U4.A1 U4.A2 U4.A5 U4.C2 U5.2

## Polygon pours and split planes (outlines as drawn)
GND on Signal Layer 1 "GND_L02_P000" (solid, pour order 0): 3937.01,3937.01 3937.01,7874.02 7874.02,7874.02 7874.02,3937.01
+1.8V on Bottom Layer "+1.8V_L04_P004" (solid, pour order 4): 6309.06,6237.84 7874.02,6240.16 7874.02,5571.22 6310.03,5571.22 6309.06,5572.2
+3.3V on Bottom Layer "+3.3V_L04_P002" (solid, pour order 2): 7874.02,6240.16 6309.06,6240.16 6309.06,5571.22 7874.02,5571.22 7874.02,3937.01 3937.01,3937.01 3937.01,7874.02 7874.02,7874.02
+3.3V on Top Layer "+3.3V_L01_P026" (solid, pour order 26): 5970,4585 5970,4655 5960,4665 5945,4665 5920,4640 5920,4585
+3.3V on Top Layer "+3.3V_L01_P024" (solid, pour order 24): 5780,4575 5875,4575 5875,4635 5850,4660 5800,4660 5780,4640
GND on Top Layer "GND_L01_P022" (solid, pour order 22): 6002.95,4575 6002.95,4535 5967.95,4500 5942.95,4500 5935,4507.95 5935,4575
GND on Top Layer "GND_L01_P020" (solid, pour order 20): 5875,4575 5875,4535 5840,4500 5815,4500 5780,4535 5780,4575
GND on Top Layer "GND_L01_P018" (solid, pour order 18): 5720,4625 5700,4605 5700,4520 5665,4520 5610,4575 5610,4630 5675,4695 5720,4695
+3.3V on Top Layer "+3.3V_L01_P016" (solid, pour order 16): 6324.57,4865.2 6464.57,4865.2 6464.57,4905.2 6419.57,4950.2 6369.57,4950.2 6324.57,4905.2
GND on Top Layer "GND_L01_P014" (solid, pour order 14): 6324.57,4845.2 6324.57,4800.2 6374.57,4750.2 6419.57,4750.2 6464.57,4795.2 6464.57,4845.2
GND on Top Layer "GND_L01_P012" (solid, pour order 12): 6256.18,4763.78 6299.21,4763.78 6336.18,4800.75 6336.18,4914.37 6296.18,4954.37 6256.18,4954.37
+3.3V on Top Layer "+3.3V_L01_P010" (solid, pour order 10): 5360,4810 5500,4810 5500,4770 5455,4725 5405,4725 5360,4770
GND on Top Layer "GND_L01_P008" (solid, pour order 8): 5360,4830 5360,4875 5410,4925 5455,4925 5500,4880 5500,4830
GND on Top Layer "GND_L01_P006" (solid, pour order 6): 5545,4745 5540,4740 5500,4740 5465,4775 5465,4875 5505,4915 5545,4915

## Other copper
Top Layer:
  text ".Layer_Name" at 8750,5180 h100
Signal Layer 1:
  text ".Layer_Name" at 8750,5000 h100
Signal Layer 2:
  text ".Layer_Name" at 8750,4820 h100
Bottom Layer:
  text ".Layer_Name" at 8750,4640 h100

## Silkscreen, mask and mechanical layers (free items; w line width, h text height)
Top Overlay:
  rectangle: 6545.28,4527.56 7303.15,4645.67
  lines w6: 4133.86,5108.27 4242.13,5108.27
  lines w8: 4901.57,4281.5 4901.57,4419.29
  text "1V8" at 7203.47,7429 h40 r90
  text "GND" at 4445.28,7421.26 h40 r90
  text "RB5" at 4545.28,7421.26 h40 r90
  text "RB6" at 4645.28,7421.26 h40 r90
  text "RB9" at 4745.28,7421.26 h40 r90
  text "3V3" at 4945.28,7421.26 h40 r90
  text "TCK" at 5570.87,7421.26 h40 r90
  text "GND" at 5670.87,7421.26 h40 r90
  text "TMS" at 5770.87,7421.26 h40 r90
  text "TDI" at 6070.87,7421.26 h40 r90
  text "TDO" at 6170.87,7421.26 h40 r90
  text "3V3" at 6270.87,7421.26 h40 r90
  text "GND" at 7103.47,7421.26 h40 r90
  text "3V3" at 7303.47,7421.26 h40 r90
  text "5V0" at 7403.47,7421.26 h40 r90
  text "RB13" at 4845.28,7387.5 h40 r90
  text "3V3" at 4278.5,7355.12 h40
  text "L3A" at 4278.5,7255.12 h40
  text "L3B" at 4278.5,7155.12 h40
  text "L4A" at 4278.5,7055.12 h40
  text "L4B" at 4278.5,6955.12 h40
  text "L6A" at 4278.5,6855.12 h40
  text "L6B" at 4278.5,6755.12 h40
  text "L20A" at 4278.5,6655.12 h40
  text "L20B" at 4278.5,6555.12 h40
  text "GND" at 4278.5,6455.12 h40
  text ".Layer_Name" at 8750,5540 h100
  text "RX" at 4153.54,5507.5 h30
  text "TX" at 4153.54,5458.29 h30
  text "GND" at 4153.54,5409.08 h30
  text "GND" at 7421.26,5112.99 h40
  text "MCLR" at 4133.5,5064.59 h30
  text "3V3" at 4153.54,5015.38 h30
  text "T27B" at 7387.5,5012.99 h40
  text "GND" at 4153.54,4966.17 h30
  text "PGD" at 4153.54,4916.95 h30
  text "T27A" at 7387.5,4912.99 h40
  text "a" at 6476.38,4872.05 h500
  text "PGC" at 4153.54,4867.74 h30
  text "GND" at 7421.26,4812.99 h40
  text "Probe-Scope Project" at 6555.12,4744.09 h40
  text "T25B" at 7387.5,4712.99 h40
  text "Digital Test '.revision'" at 6555.12,4675.2 h40
  text "T25A" at 7387.5,4612.99 h40
  text "GND" at 7421.26,4512.99 h40
  text "3V3" at 7421.26,4412.99 h40
  text "SDI" at 4459.05,4278.5 h40 r90
  text "SDO" at 4559.06,4278.5 h40 r90
  text "SCK" at 4659.06,4278.5 h40 r90
  text "SS" at 4759.06,4278.5 h40 r90
  text "RDY" at 4859.06,4278.5 h40 r90
  text "LDAC" at 4959.06,4278.5 h40 r90
  text "SDA" at 5059.06,4278.5 h40 r90
  text "SCL" at 5159.06,4278.5 h40 r90
  text "3V3" at 6814.57,4278.5 h40 r90
  text "GND" at 6914.57,4278.5 h40 r90
Bottom Overlay:
  text ".Layer_Name" at 8750,4280 h100
Top Paste:
  text ".Layer_Name" at 8750,5720 h100
Bottom Paste:
  text ".Layer_Name" at 8750,4100 h100
Top Solder:
  text ".Layer_Name" at 8750,5360 h100
Bottom Solder:
  text ".Layer_Name" at 8750,4460 h100
Board Outline:
  the board outline again, w10
  text ".Layer_Name" at 8750,3920 h100
Notes:
  text "Notes:" at 8865,7780 h60
  text "1. Base material is 0.062 thick FR4" at 8865,7690 h60
  text "2. Foils to finish at 1oz" at 8865,7605 h60
  text "3. All hole sizes are after plating" at 8865,7525 h60
  text "4. Soldermask with L.P.I, Color is Green" at 8865,7440 h60
  text "5. Soldercoat after soldermask" at 8865,7350 h60
  text "6. Silkscreen with white epoxy" at 8865,7260 h60
  text "7. Holes with zero diameter pads are unplated" at 8865,7165 h60
Title Block:
  lines w5: 1000,3125 1200,3125 ; 1000,5250 1200,5250 ; 1000,7375 1200,7375 ; 3750,1000 3750,1200 ; 3750,9300 3750,9500 ; 5075,1200 5075,1300 ; 6500,1000 6500,1200 ; 6500,9300 6500,9500 ; 7300,1600 11800,1600 ; 7300,1900 11800,1900 ; 7300,2200 8800,2200 ; 8800,1300 8800,1900 8800,2500 ; 9250,1000 9250,1200 ; 9250,9300 9250,9500 ; 10900,1300 10900,1900 ; 11800,3125 12000,3125 ; 11800,5250 12000,5250 ; 11800,7375 12000,7375 ; 5075,1300 5075,2500 7300,2500 ; 5075,1300 7300,1300 ; 7300,1300 7300,2500 ; 7300,1300 11800,1300 11800,2500 8800,2500 ; 7300,2500 8800,2500 ; 1000,1000 1000,9500 12000,9500 12000,1000 1000,1000 ; 1200,1200 11800,1200 11800,9300 1200,9300 1200,1200
  text "1" at 2351.34,9365 h70
  text "2" at 5102,9365 h70
  text "3" at 7847,9365 h70
  text "4" at 10598.01,9365 h70
  text "A" at 1075,8347 h70
  text "A" at 11875,8347 h70
  text "B" at 1075,6222 h70
  text "B" at 11875,6222 h70
  text "C" at 1075,4097 h70
  text "C" at 11875,4097 h70
  text "ENGINEER:" at 7350,2400 h45
  text "TITLE:" at 8850,2400 h45
  text "J. Rowley, M. Omo" at 7400,2280 h70
  text "PCB DESIGNER:" at 7350,2105 h45
  text "J. Rowley" at 7400,1980 h70
  text "D" at 1075,1977 h70
  text "D" at 11875,1977 h70
  text "Probe-Scope ADC/Digital Section Test" at 8900,1925 h140
  text "DATE:" at 7350,1800 h45
  text "PART NO.:" at 8850,1800 h45
  text "REV:" at 10950,1800 h45
  text "a" at 5540,1700 h787.4
  text ".PRINT_DATE" at 7400,1680 h70
  text ".revision" at 11000,1680 h70
  text "ASP0020" at 8875,1675 h70
  text "Unified USB Oscilloscope Probe" at 5150,1525 h70
  text "SHEET SIZE:" at 7350,1500 h45
  text "DWG NO:" at 8850,1500 h45
  text "SCALE:" at 10950,1500 h45
  text "Copyright 2019 M. Omo, J. Rowley, K. Hall" at 5143,1394.67 h70
  text "NONE" at 11000,1380 h70
  text "LETTER" at 7375,1375 h70
  text "CAD0020" at 8875,1375 h70
  text "Released under the CERN OHL v1.2" at 5143,1294.67 h70
  text "FILE PATH:" at 5100,1225 h45
  text ".PCB_FILE_NAME" at 5450,1225 h45
  text "1" at 2351.34,1065 h70
  text "2" at 5102,1065 h70
  text "3" at 7847,1065 h70
  text "4" at 10598.01,1065 h70

## Dimensions
7874.02,3937.01 to 3937.01,3937.01 on Board Outline
7874.02,7874.02 to 7874.02,3937.01 on Board Outline

## Text inside footprints (layer, text, board x,y; h text height)
P3: Notes "PCB Edge" at 3809.06,5721.46 h40 r270
U1: Component Bodies "*" at 6033.46,4872.05 h73.82 r180; Component Bodies "*" at 6033.46,4872.05 h73.82 r180
U2: Component Bodies "*" at 5514.51,6234.84 h50